# EAGLE board DC_Current (EAGLE 6.4)
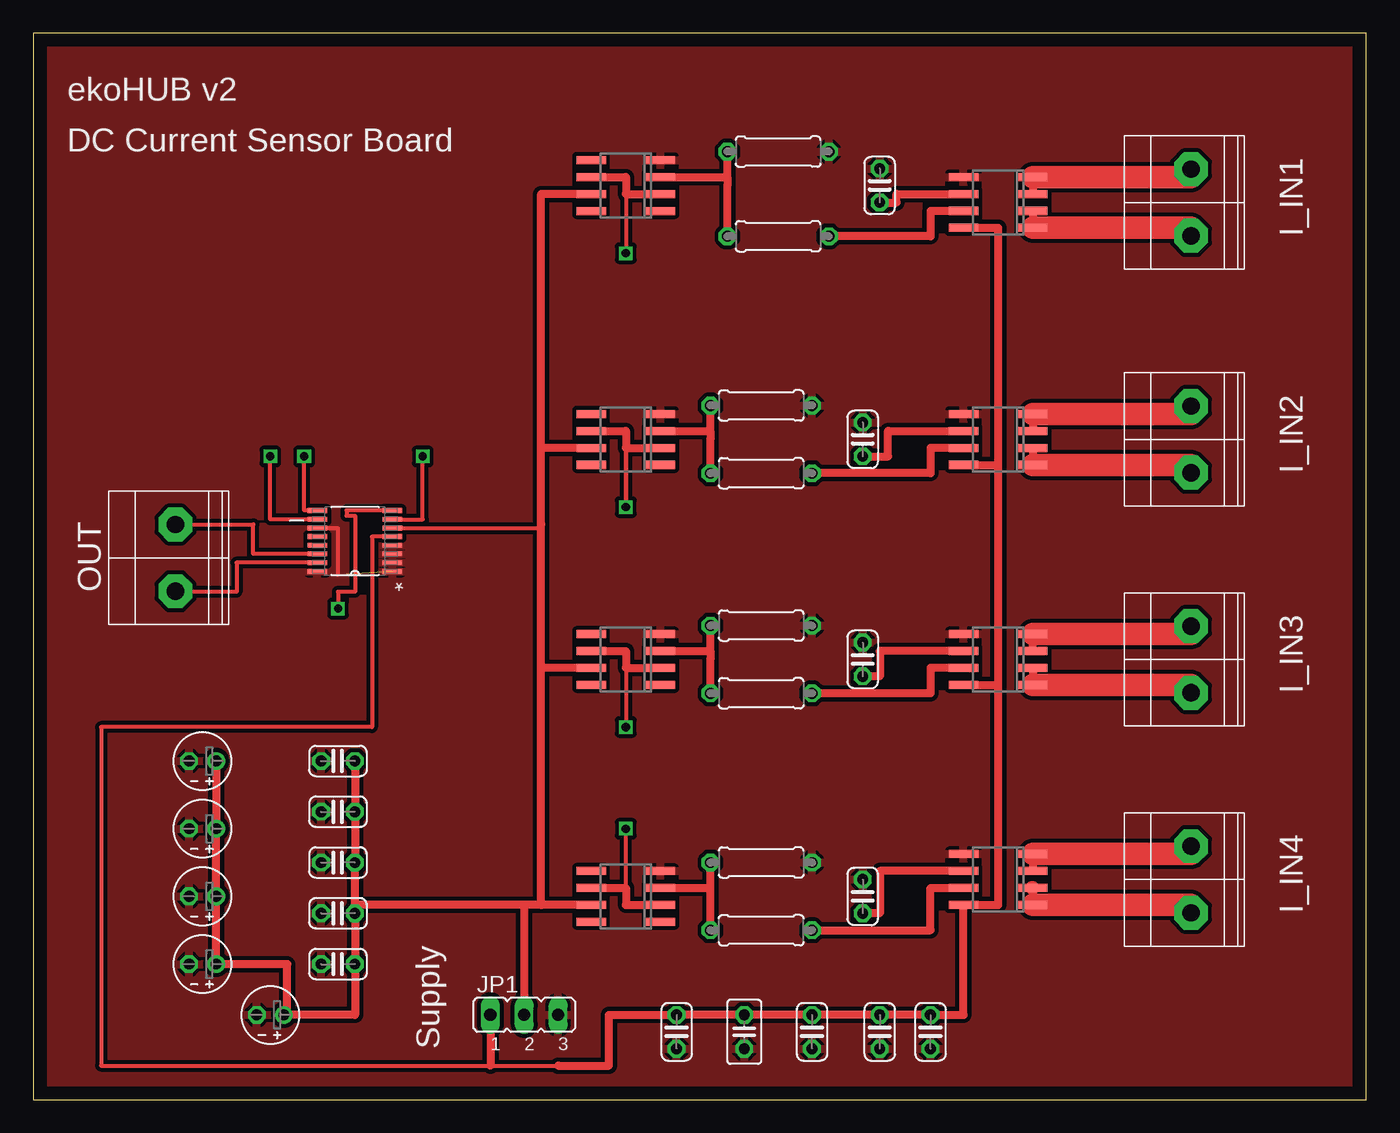
[diagram p0: board, top side]
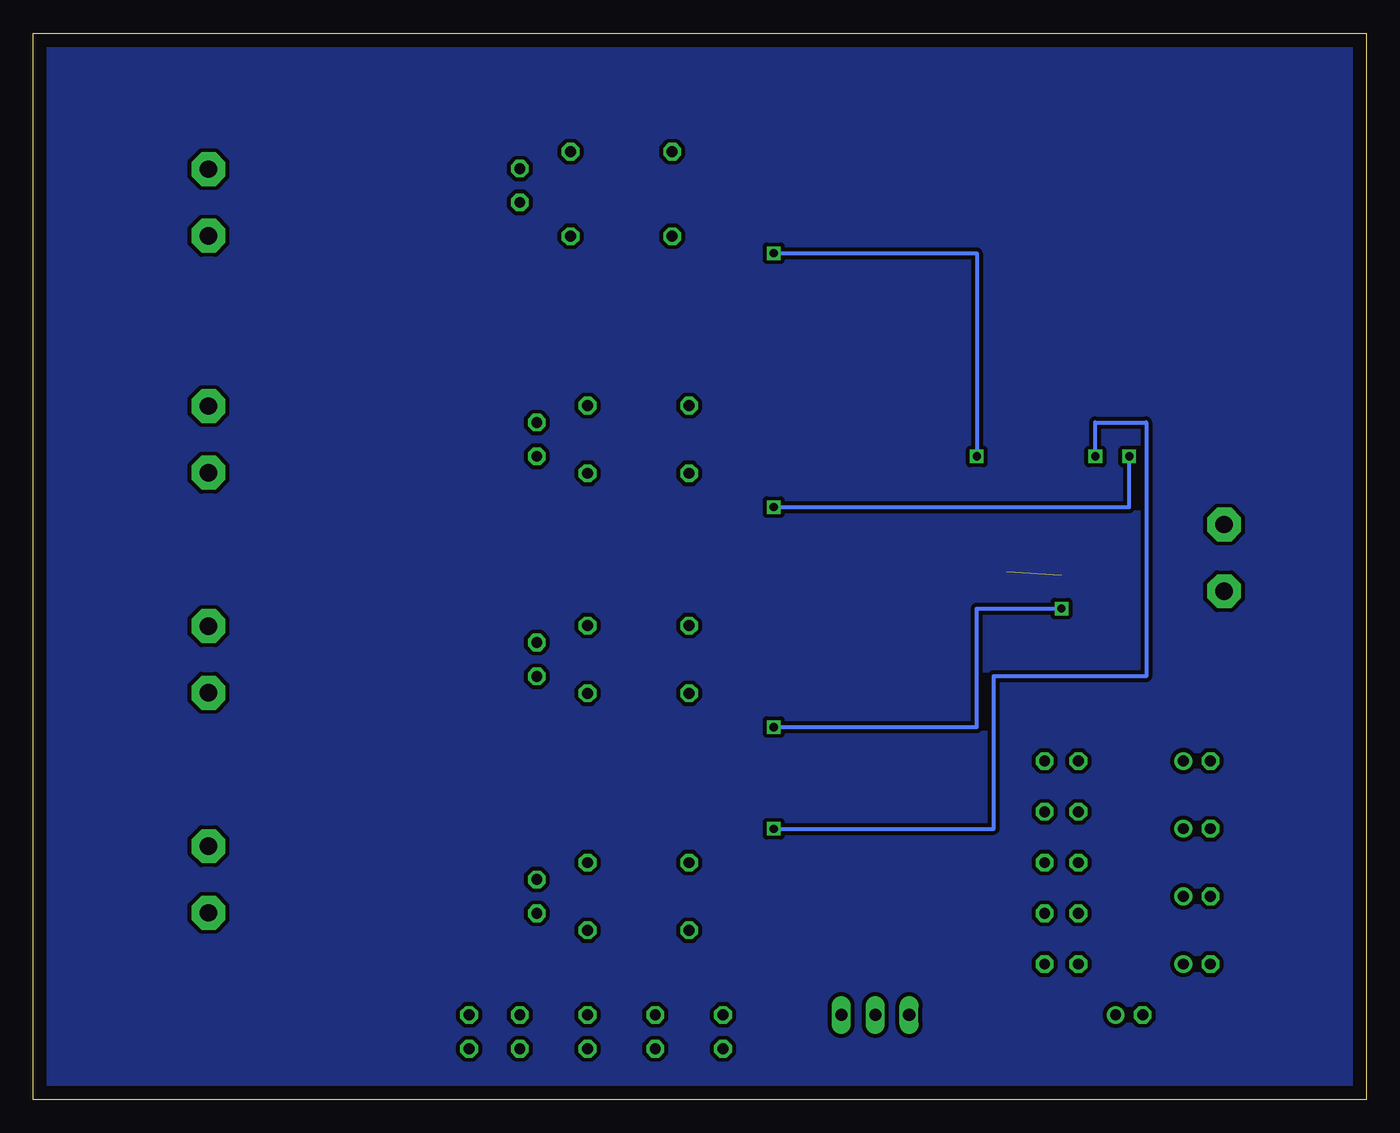
[diagram p1: board, bottom side, seen from below]

Size 100 x 80 mm. Coordinates in mm from the lower left corner, seen from the top.
Outline: 0,0 100,0 100,80 0,80 0,0
Copper layers (1*16): Top 0.035mm / dielectric 1.5mm / Bottom 0.035mm
Design rules "default *": minimum track width 10mil, minimum drill 24mil, track to track 12mil, track to pad 12mil, pad to pad 12mil, via to via 12mil, smd to smd 8mil, copper to edge 40mil, drill to drill 8mil, minimum pad ring 10mil, minimum via ring 8mil, stop-mask expansion 4mil, vias tented up to drill 0mil, thermal gap 10mil

## Footprints (pad centres in the part's own frame; a part is rotated, then mirrored left to right if it is on the bottom)
C025-024X044 = drill 0.813 octagon: 1 -1.27,0; 2 1.27,0
E2-4 = drill 0.813 pad 1.27: + -1.016,0 | drill 0.813 pad 1.27 octagon: - 1.016,0
C025-025X050 = drill 0.813 octagon: 1 -1.27,0; 2 1.27,0
JP2 = drill 0.914 long: 1 -2.54,0; 2 0,0; 3 2.54,0
0207/7 = drill 0.813 octagon: 1 -3.81,0; 2 3.81,0
SO8 = smd 0.6 x 2.2: 1 -1.905,-2.6; 2 -0.635,-2.6; 3 0.635,-2.6; 4 1.905,-2.6; 5 1.905,2.6; 6 0.635,2.6; 7 -0.635,2.6; 8 -1.905,2.6
SOP65P640X120-16N = smd 1.473 x 0.356: 1 -2.819,2.286; 2 -2.819,1.626; 3 -2.819,0.965; 4 -2.819,0.33; 5 -2.819,-0.33; 6 -2.819,-0.965; 7 -2.819,-1.626; 8 -2.819,-2.286; 9 2.819,-2.286; 10 2.819,-1.626; 11 2.819,-0.965; 12 2.819,-0.33; 13 2.819,0.33; 14 2.819,0.965; 15 2.819,1.626; 16 2.819,2.286
CTB1500-2 = drill 1.3 pad 2.54 octagon: P$1 -2.5,0.5; P$2 2.5,0.5

## Placement (x,y rotation side)
C1  [C025-024X044]  63.5,5.08 270 top
C2  [C025-024X044]  62.23,49.53 90 top
C3  [C025-024X044]  22.86,10.16 180 top
C4  [C025-024X044]  22.86,13.97 180 top
C5  [E2-4]  12.7,25.4 180 top
C6  [C025-024X044]  48.26,5.08 270 top
C7  [C025-024X044]  62.23,33.02 90 top
C8  [E2-4]  12.7,15.24 180 top
C9  [C025-024X044]  22.86,21.59 180 top
C10  [E2-4]  17.78,6.35 180 top
C11  [C025-024X044]  58.42,5.08 270 top
C12  [C025-024X044]  63.5,68.58 90 top
C13  [E2-4]  12.7,10.16 180 top
C14  [C025-024X044]  22.86,25.4 180 top
C15  [E2-4]  12.7,20.32 180 top
C16  [C025-025X050]  53.34,5.08 270 top
C21  [C025-024X044]  67.31,5.08 270 top
C22  [C025-024X044]  62.23,15.24 90 top
C24  [C025-024X044]  22.86,17.78 180 top
JP1  [JP2]  36.83,6.35 0 top
R2  [0207/7]  54.61,46.99 180 top
R3  [0207/7]  54.61,52.07 180 top
R5  [0207/7]  54.61,30.48 180 top
R6  [0207/7]  54.61,35.56 180 top
R8  [0207/7]  55.88,64.77 180 top
R9  [0207/7]  55.88,71.12 180 top
R11  [0207/7]  54.61,17.78 180 top
R12  [0207/7]  54.61,12.7 0 top
U1  MCP601  [SO8]  44.45,49.53 90 top
U2  MCP601  [SO8]  44.45,33.02 90 top
U3  MCP601  [SO8]  44.45,68.58 90 top
U4  AD7993BRUZ-0  [SOP65P640X120-16N]  24.13,41.91 180 top
U5  MCP601  [SO8]  44.45,15.24 90 top
U$1  ACS712  [SO8]  72.39,49.53 90 top
U$2  CTB1500/2  [CTB1500-2]  86.36,49.53 270 top
U$3  ACS712  [SO8]  72.39,33.02 90 top
U$4  CTB1500/2  [CTB1500-2]  86.36,33.02 270 top
U$5  ACS712  [SO8]  72.39,67.31 90 top
U$6  CTB1500/2  [CTB1500-2]  86.36,67.31 270 top
U$8  CTB1500/2  [CTB1500-2]  10.16,40.64 270 top
U$9  ACS712  [SO8]  72.39,16.51 90 top
U$10  CTB1500/2  [CTB1500-2]  86.36,16.51 270 top

## Library data of the parts
C1-C16 C21 C22 C24 R2 R3 R5 R6 R8 R9 R11 R12 = resistor
JP1 = jumper
U1-U3 U5 U$1-U$6 U$8-U$10 = eko-parts
U4 = ADC; MPN: AD7993BRUZ-0; OC_FARNELL: 1078309; OC_NEWARK: 59K6101; PACKAGE: TSSOP-16; SUPPLIER: Analog Devices

## Nets
+3V3: C3.1 C4.1 C5.+ C8.+ C9.1 C10.+ C13.+ C14.1 C15.+ C24.1 JP1.2 U1.7 U2.7 U3.7 U4.6 U5.7
+5V: C1.1 C6.1 C11.1 C16.1 C21.1 JP1.1 U4.5 U$1.8 U$3.8 U$5.8 U$9.8
GND: C1.2 C2.2 C3.2 C4.2 C5.- C6.2 C7.2 C8.- C9.2 C10.- C11.2 C12.2 C13.- C14.2 C15.- C16.2 C21.2 C22.2 C24.2 JP1.3 R3.1 R6.1 R9.1 R11.1 U1.4 U2.4 U3.4 U4.1 U4.2 U4.3 U4.4 U4.11 U4.16 U5.4 U$1.5 U$3.5 U$5.5 U$9.5
I_OUT: U1.2 U1.6 U4.10
I_OUT1: U2.2 U2.6 U4.8
I_OUT2: U3.2 U3.6 U4.7
I_OUT4: U4.9 U5.2 U5.6
N$2: U$1.3 U$1.4 U$2.P$1
N$4: C2.1 U$1.6
N$5: U$3.3 U$3.4 U$4.P$1
N$6: R2.1 U$1.7
N$7: R8.1 U$5.7
N$8: C7.1 U$3.6
N$9: R2.2 R3.2 U1.3
N$10: R5.1 U$3.7
N$11: R12.2 U$9.7
N$12: R5.2 R6.2 U2.3
N$14: U$5.3 U$5.4 U$6.P$1
N$15: C12.1 U$5.6
N$16: U$5.1 U$5.2 U$6.P$2
N$17: U$1.1 U$1.2 U$2.P$2
N$18: R8.2 R9.2 U3.3
N$19: U$3.1 U$3.2 U$4.P$2
N$20: U$9.1 U$9.2 U$10.P$2
N$22: U4.14 U$8.P$1
N$23: U4.15 U$8.P$2
N$26: U$9.3 U$9.4 U$10.P$1
N$27: C22.1 U$9.6
N$30: R11.2 R12.1 U5.3

## Tracks (layer width: path | path; a pad name or v marks a point on that pad's centre or on a via)
+3V3
  Top 0.305: U4.6 38.1,42.88 38.1,43.18
  Top 0.61: 36.83,14.61 24.13,14.61 | 24.13,14.61 C4.1 C3.1 24.13,6.35 C10.+ 19.05,6.35 19.05,10.16 C13.+ C8.+ C15.+ C5.+ | 24.13,14.61 C24.1 C9.1 C14.1 | U5.7 38.1,14.61 | 38.1,14.61 38.1,32.38 | 38.1,32.38 38.1,43.18 38.1,48.9 | 38.1,48.9 38.1,67.94 U3.7 | U2.7 38.1,32.38 | U1.7 38.1,48.9 | 38.1,14.61 36.83,14.61 | 36.83,14.61 JP1.2
+5V
  Top 0.305: U4.5 25.4,42.24 25.4,27.94 5.08,27.94 5.08,2.54 34.29,2.54 39.37,2.54
  Top 0.61: 72.39,31.11 72.39,14.61 U$9.8 69.79,6.35 C21.1 C1.1 C11.1 C16.1 C6.1 43.18,6.35 43.18,2.54 39.37,2.54 | 72.39,31.11 72.39,47.62 | 72.39,47.62 72.39,65.41 U$5.8 | U$1.8 72.39,47.62 | U$3.8 72.39,31.11 | JP1.1 34.29,2.54
GND  (1 unrouted)
  Top 0.305: 22.86,39.37 22.86,42.88 U4.11
  pour Top: 0,80.01 100.33,80.01 100.33,0 0,0
I_OUT  (via drill 0.61)
  Top 0.305: U4.10 17.78,43.54 v17.78,48.26 | 44.45,48.9 v44.45,44.45 44.45,50.16
  Top 0.61: U1.2 44.45,48.9 44.45,50.16 U1.6
  Bottom 0.305: v44.45,44.45 17.78,44.45 v17.78,48.26
I_OUT1  (via drill 0.61)
  Top 0.305: 44.45,32.38 v44.45,27.94 44.45,33.66 | U4.8 23.5,44.2 23.5,43.81 24.13,43.81 24.13,38.1 22.86,38.1 v22.86,36.83
  Top 0.61: U2.2 44.45,32.38 44.45,33.66 U2.6
  Bottom 0.305: v44.45,27.94 29.21,27.94 29.21,36.83 v22.86,36.83
I_OUT2  (via drill 0.61)
  Top 0.305: U4.7 29.21,43.54 v29.21,48.26 | 44.45,67.94 v44.45,63.5
  Top 0.61: U3.2 44.45,67.94 44.45,69.22 U3.6
  Bottom 0.305: v44.45,63.5 29.21,63.5 v29.21,48.26
I_OUT4  (via drill 0.61)
  Top 0.305: U4.9 20.32,44.2 v20.32,48.26 | 44.45,15.88 v44.45,20.32
  Top 0.61: U5.2 44.45,14.61 44.45,15.88 U5.6
  Bottom 0.305: v44.45,20.32 27.94,20.32 27.94,31.75 16.51,31.75 16.51,50.8 20.32,50.8 v20.32,48.26
N$2
  Top 0.61: U$1.4 U$1.3
  Top 1.676: U$1.4 86.86,51.44 U$2.P$1
N$4
  Top 0.61: C2.1 64.14,48.26 64.14,50.16 U$1.6
N$5
  Top 0.61: U$3.3 U$3.4
  Top 1.676: U$3.4 86.86,34.92 U$4.P$1
N$6
  Top 0.61: U$1.7 67.31,48.9 67.31,46.99 R2.1
N$7
  Top 0.61: U$5.7 67.31,66.67 67.31,64.77 R8.1
N$8
  Top 0.61: U$3.6 63.5,33.66 63.5,31.75 C7.1
N$9
  Top 0.61: R2.2 50.8,49.53 50.8,50.16 | 50.8,50.16 R3.2 | U1.3 50.8,50.16
N$10
  Top 0.61: U$3.7 67.31,32.38 67.31,30.48 R5.1
N$11
  Top 0.61: R12.2 67.31,12.7 67.31,15.88 U$9.7
N$12
  Top 0.61: R5.2 50.8,33.02 50.8,33.66 | 50.8,33.66 R6.2 | U2.3 50.8,33.66
N$14
  Top 0.61: U$5.4 U$5.3
  Top 1.676: U$5.4 86.86,69.22 U$6.P$1
N$15
  Top 0.61: C12.1 64.77,67.31 64.77,67.94 U$5.6
N$16
  Top 0.61: U$5.2 U$5.1
  Top 1.27: U$5.1 74.93,65.41
  Top 1.676: U$5.1 86.86,65.41 U$6.P$2
N$17
  Top 0.61: U$1.2 U$1.1
  Top 1.676: U$1.1 86.86,47.62 U$2.P$2
N$18
  Top 0.61: R8.2 52.07,68.58 52.07,69.22 | 52.07,69.22 R9.2 | U3.3 52.07,69.22
N$19
  Top 0.61: U$3.2 U$3.1
  Top 1.016: U$3.1 74.93,31.11
  Top 1.676: U$3.1 86.86,31.11 U$4.P$2
N$20
  Top 0.61: U$9.2 U$9.1
  Top 1.016: U$9.2 74.93,15.88
  Top 1.676: U$9.1 86.86,14.61 U$10.P$2
N$21
  pour Bottom: 0,80.01 100.33,80.01 100.33,0 0,0
N$22
  Top 0.305: U$8.P$1 16.51,43.14 | 16.51,43.14 16.51,43.18 | U4.14 16.51,40.95 16.51,43.14
N$23
  Top 0.305: U4.15 15.24,40.28 15.24,38.1 10.66,38.1 U$8.P$2
N$26
  Top 0.61: U$9.4 U$9.3
  Top 1.676: U$9.4 86.86,18.41 U$10.P$1
N$27
  Top 0.61: U$9.6 63.5,17.14 63.5,13.97 C22.1
N$30
  Top 0.61: R12.1 50.8,15.88 | R11.2 50.8,16.51 50.8,15.88 | U5.3 50.8,15.88

## Text on the board
tPlace: ekoHUB v2 | DC Current Sensor Board | I_IN1 | I_IN2 | OUT | I_IN3 | I_IN4 | Supply